# Altium PCB PCB1.PcbDoc
Units mm, origin at the board's own origin, x right, y up, seen from the top; angles counter-clockwise.
Board outline 60.2 x 55.89 mm, 2 copper layers (Top Layer, Bottom Layer); 37 components, 36 nets, 189 pads, 46 vias.
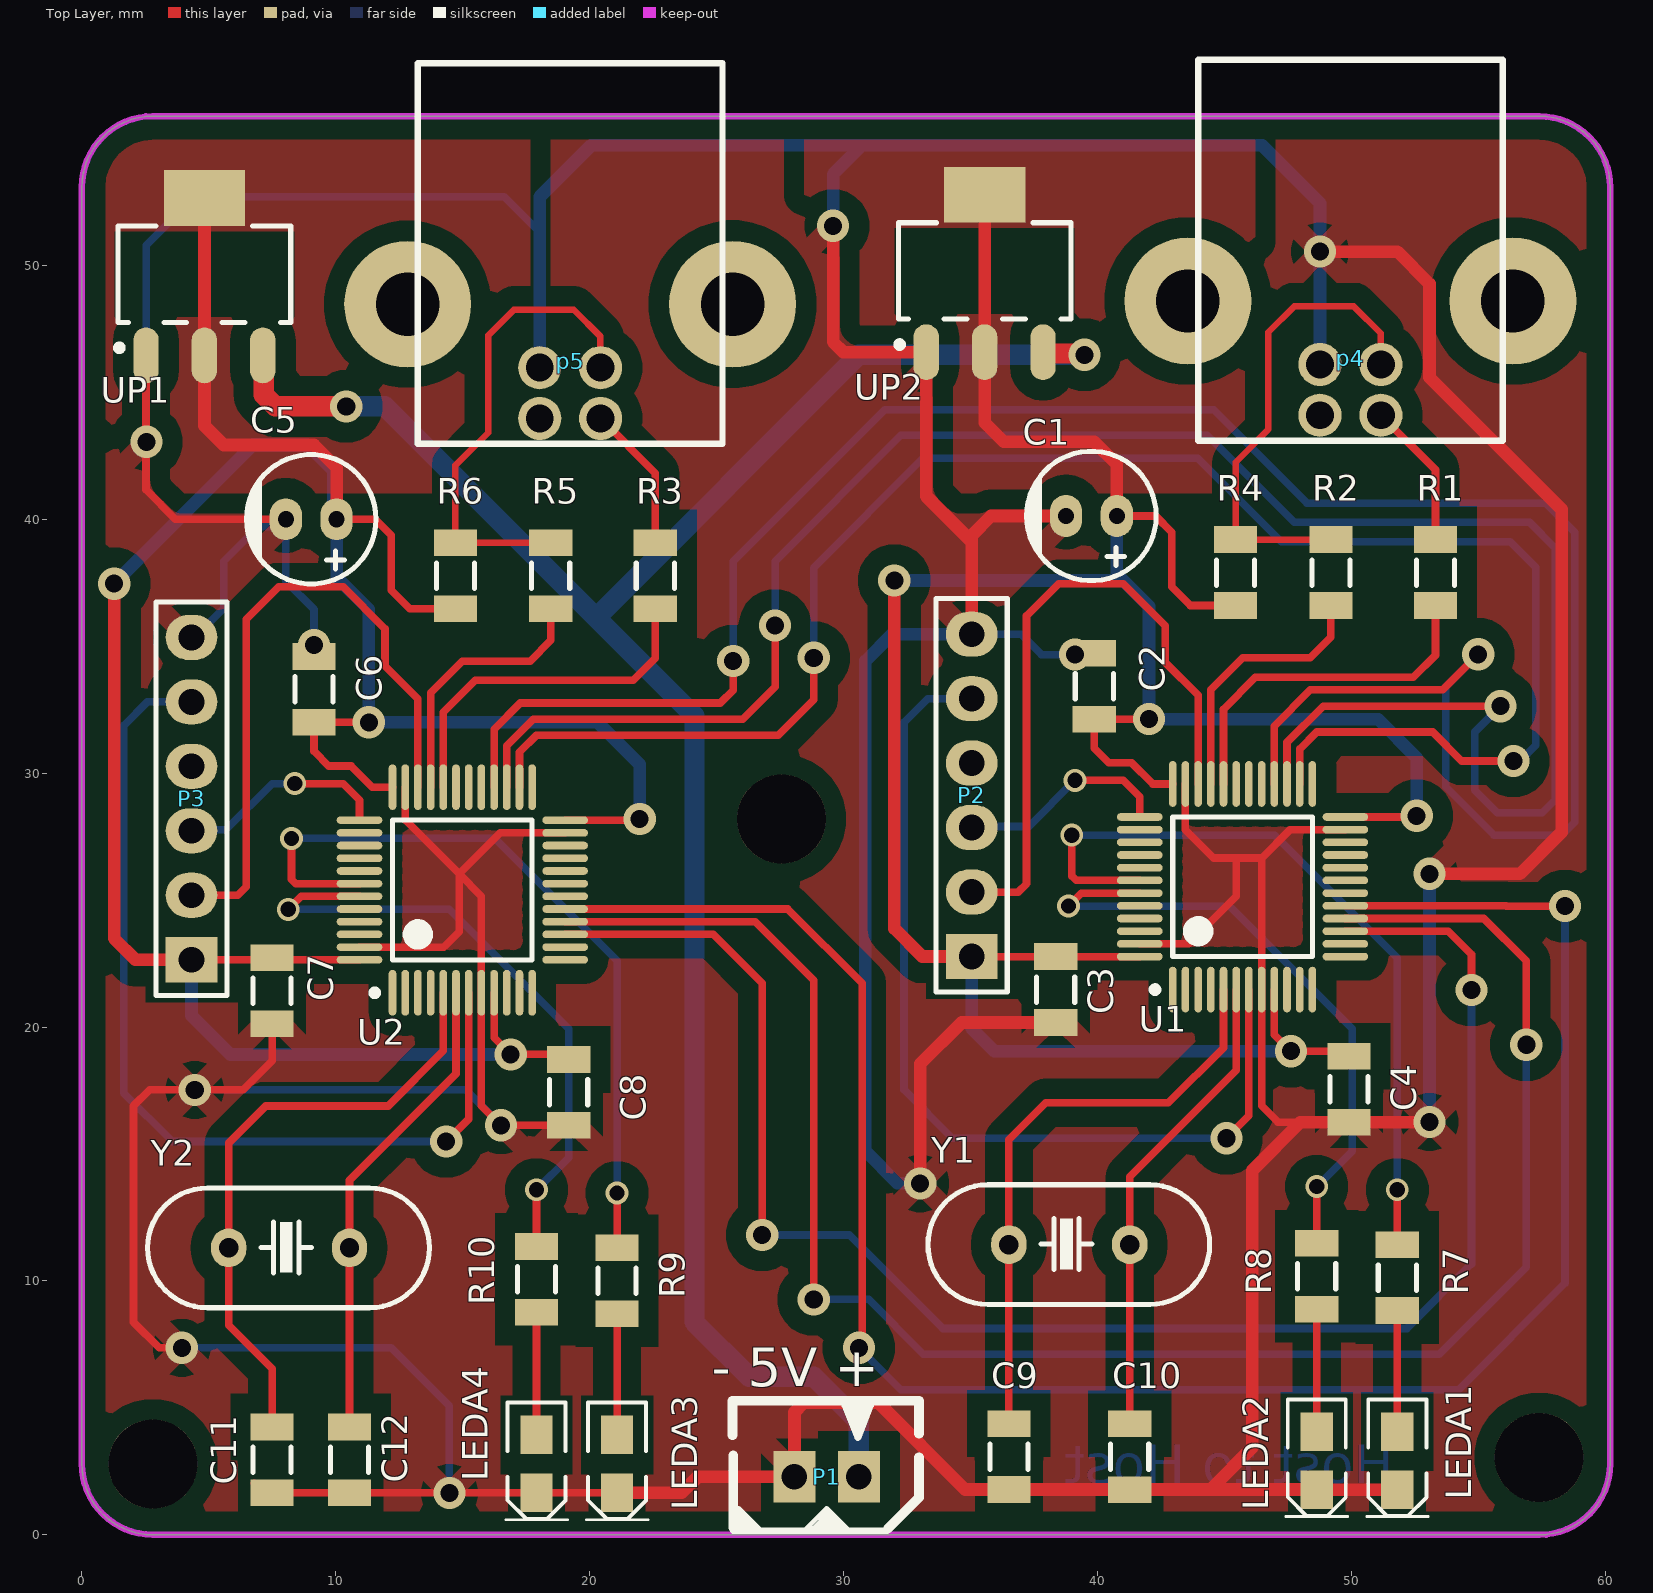
[diagram p0: Top Layer view]
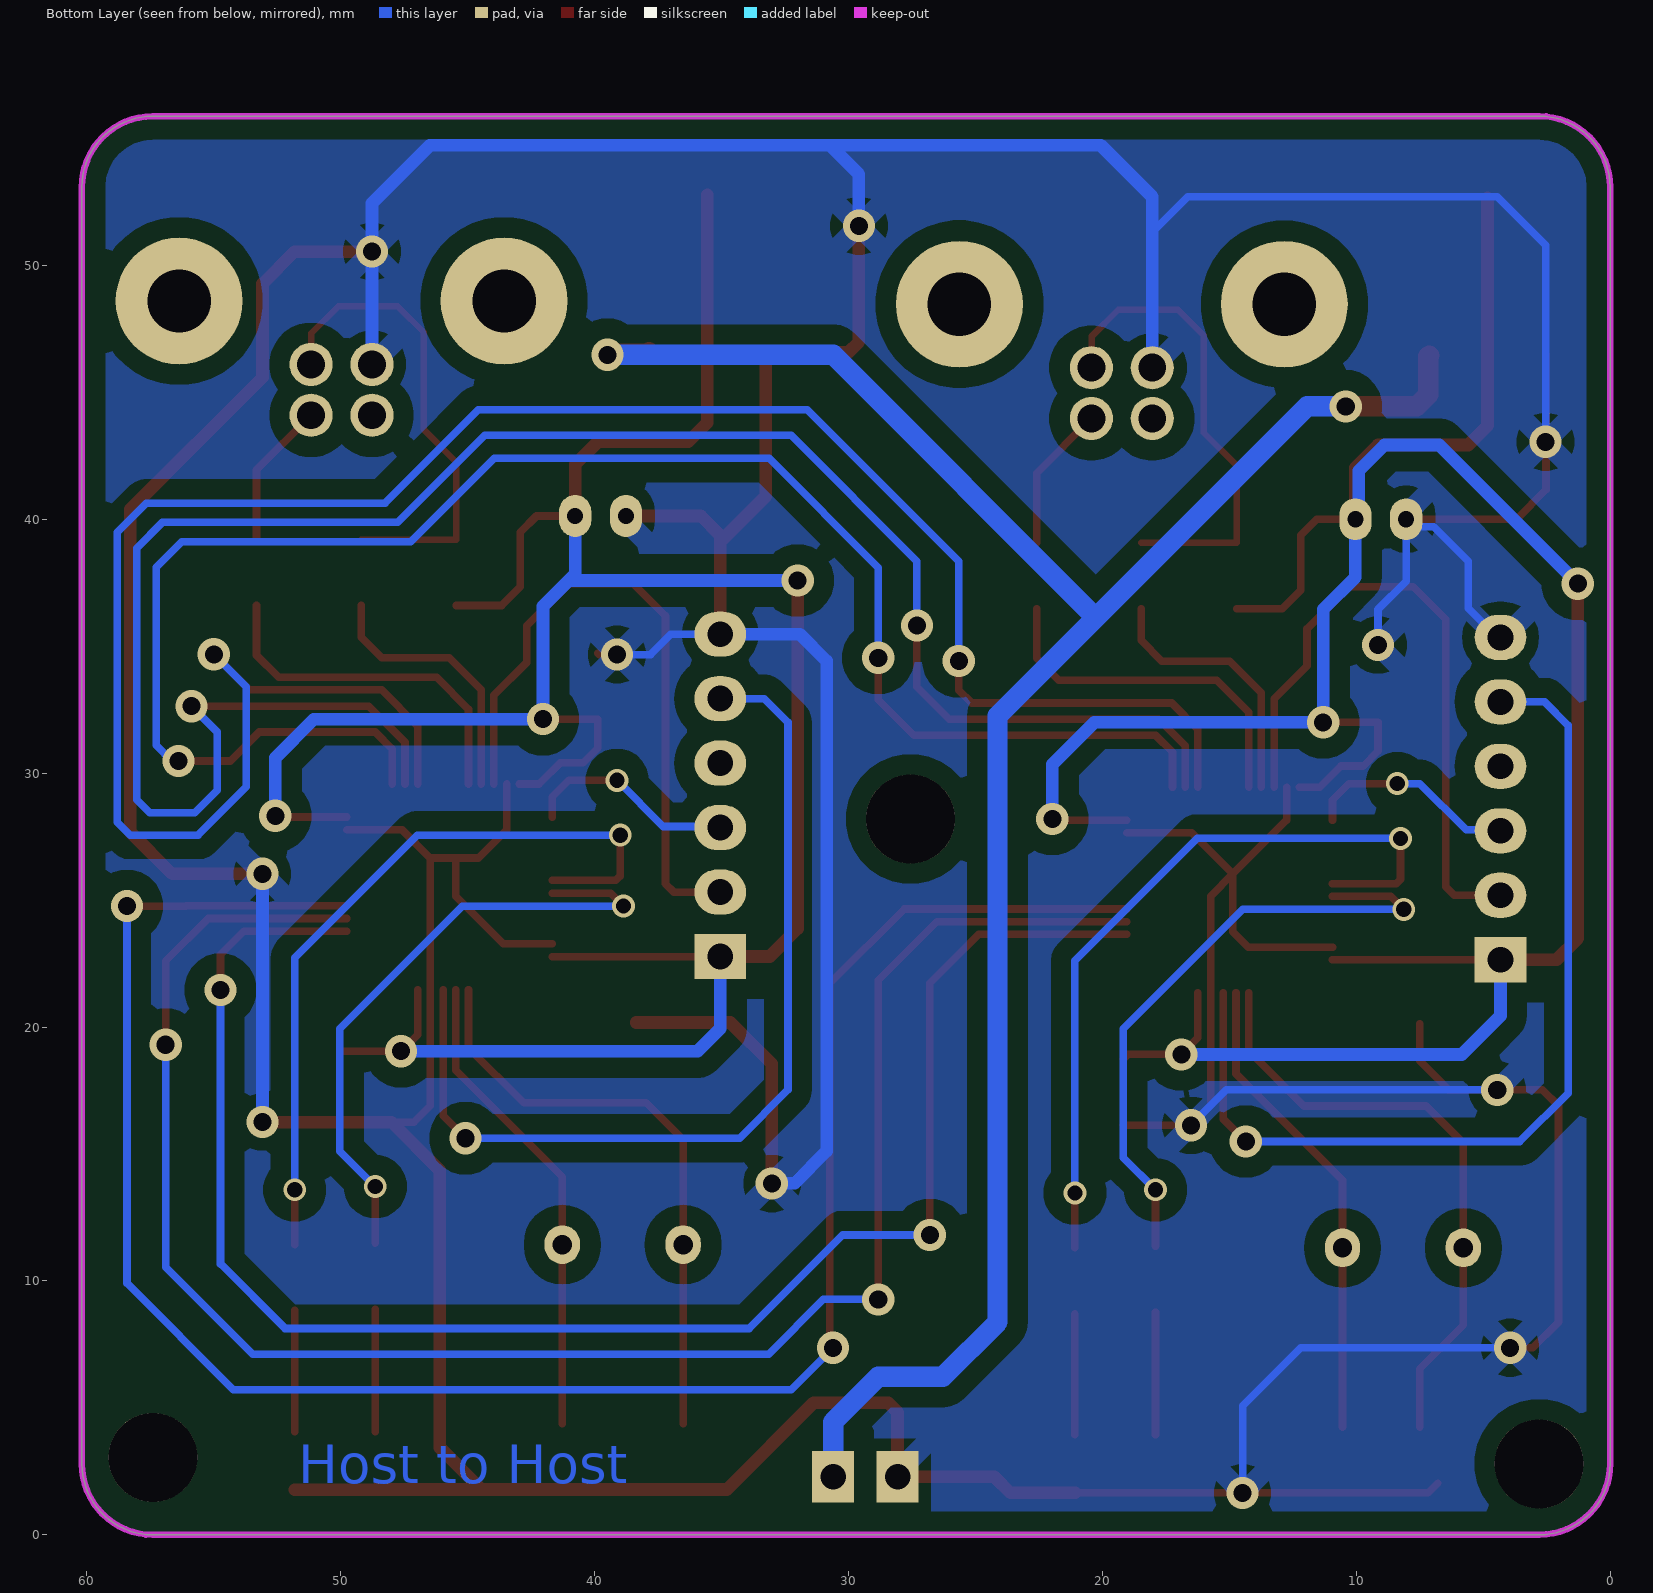
[diagram p1: Bottom Layer view, seen from below]
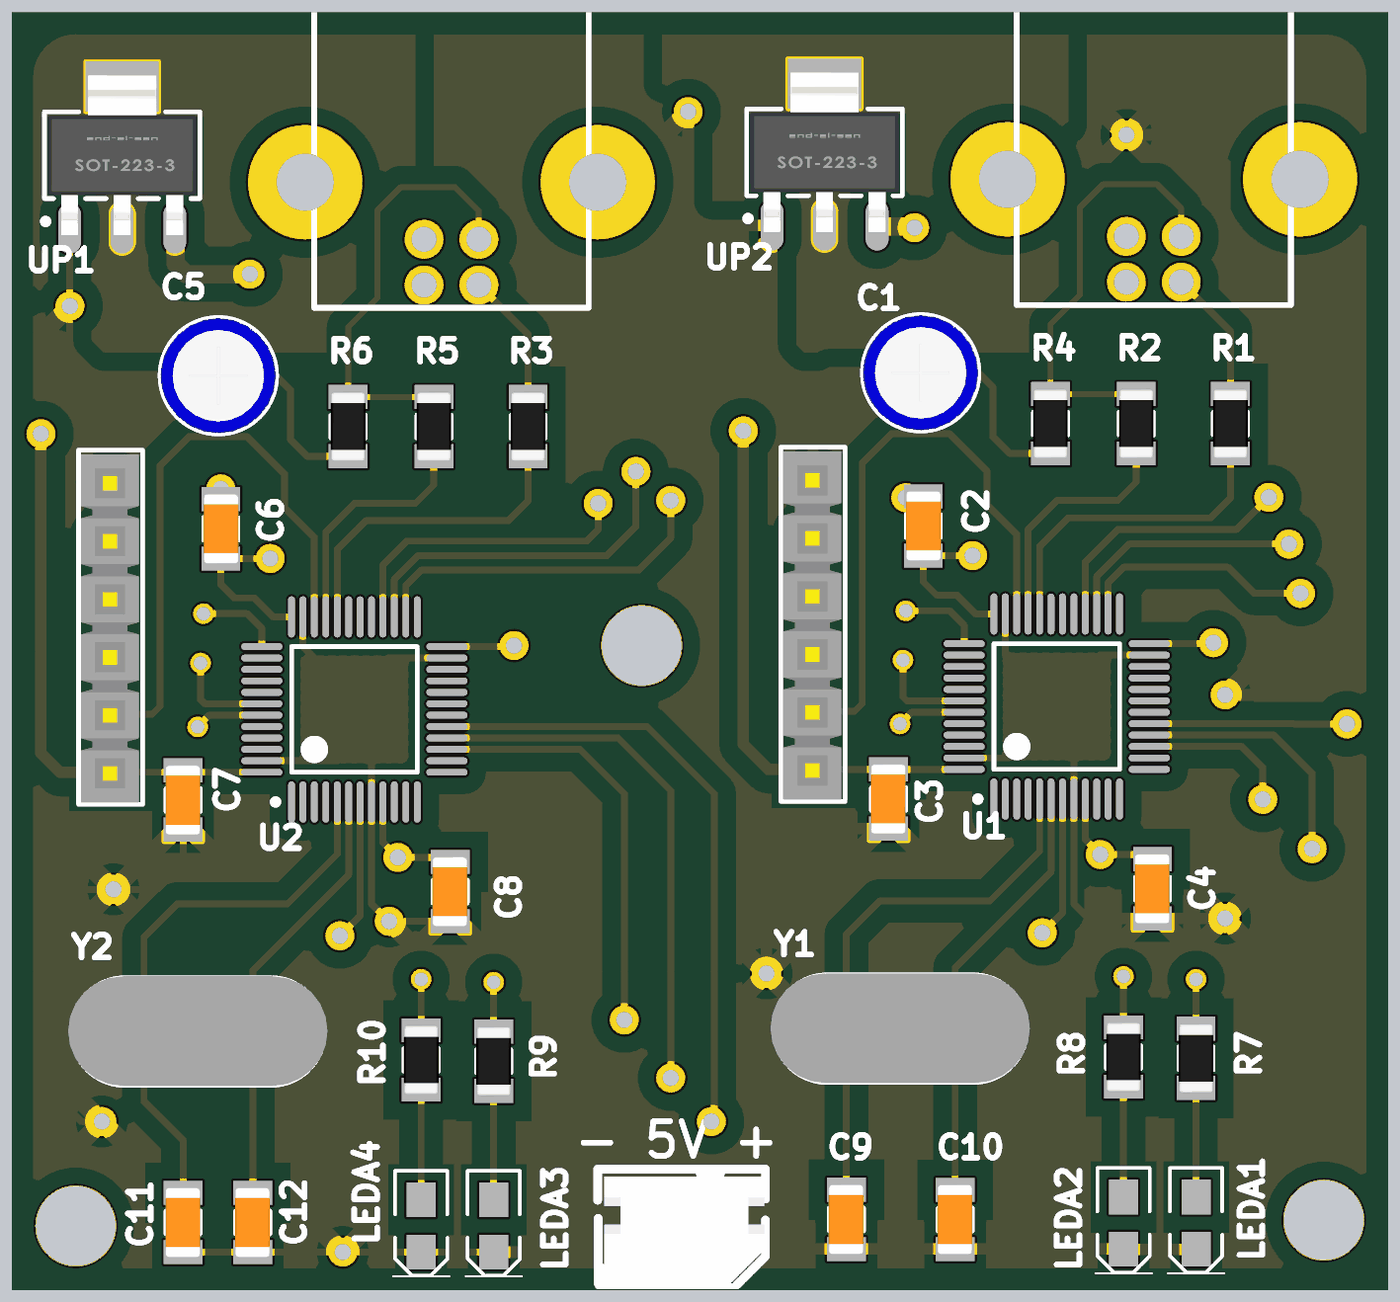
[diagram p2: 3D render of the assembled board from above, using the file's embedded part models]

## Layer stack, top to bottom
Top Solder: solder mask 0.0102, Solder Resist, Dk 3.5
Top Layer: signal copper 0.0356
Dielectric 1: dielectric 0.32, FR-4, Dk 4.8
Bottom Layer: signal copper 0.0356
Bottom Solder: solder mask 0.0102, Solder Resist, Dk 3.5

## Board outline
2.794,0 cw(c2.794,2.797) -0.003,2.797 0,2.794 0,53.086 cw(c2.797,53.086) 2.797,55.883 2.794,55.88 57.404,55.88 cw(c57.404,53.083) 60.201,53.083 60.198,53.086 60.198,2.794 cw(c57.401,2.794) 57.401,-0.003 57.404,0

## Design rules (kind name [scope] priority, off if disabled: settings)
Clearance [All] p1: gap=0.8 ignorepadtopadclearanceinfootprint=FALSE
PolygonConnect [All] p1: connectstyle=Direct reliefconductorwidth=0.8 reliefentries=4 polygonreliefangle="45 Angle" airgapwidth=0.5
RoutingVias [All] p1: holewidth=0.711 width=1.27 viastyle="Through Hole" minholewidth=0.711 minwidth=1.27 maxholewidth=0.711 maxwidth=1.27
SolderMaskExpansion [All] p1: expansion=0.102 istentingtop=FALSE
Width [All] p1: maxlimit=1 minlimit=0.254 preferedwidth=0.5
30 further rules are at their usual default settings.

## Components (designator, comment, footprint, x,y, rotation, side; value= is the part's Value field where it differs from the comment)
C1 "10uF" "cap 01" 39.767,40.132 r0 top
C2 "100nF" SMD_CAP_1206 39.878,32.131 r90 top
C3 "100nF" SMD_CAP_1206 38.361,22.777 r270 top
C4 "100nF" SMD_CAP_1206 49.911,18.852 r270 top
C5 "10uF" "cap 01" 9.033,40.005 r0 top
C6 "100nF" SMD_CAP_1206 9.144,32.004 r90 top
C7 "100nF" SMD_CAP_1206 7.493,22.733 r270 top
C8 "100nF" SMD_CAP_1206 19.177,18.725 r270 top
C9 "10pF" SMD_CAP_1206 36.515,4.379 r270 top
C10 "10pF" SMD_CAP_1206 41.275,4.374 r270 top
C11 "10pF" SMD_CAP_1206 7.493,4.247 r270 top
C12 "10pF" SMD_CAP_1206 10.541,4.247 r270 top
LEDA1 "LED0" SMD_08_05_LED 51.816,2.921 r270 top
LEDA2 "LED0" SMD_08_05_LED 48.641,2.921 r270 top
LEDA3 "LED0" SMD_08_05_LED 21.082,2.794 r270 top
LEDA4 "LED0" SMD_08_05_LED 17.907,2.794 r270 top
P1 "- 5V +" TMS2-M/R 28.988,3.492 r90 top
P2 "Header 6" "HEADER 6X1" 35.052,22.777 r90 top
P3 "Header 6" "HEADER 6X1" 4.318,22.65 r90 top
p4 "usb4" ConUSB_B_F 49.968,46.351 r90 top
p5 "usb4" ConUSB_B_F 19.234,46.224 r90 top
R1 "22R" SMD_RES_1206 53.32,39.203 r270 top value=1K
R2 "22R" SMD_RES_1206 49.2,39.203 r270 top value=1K
R3 "22R" SMD_RES_1206 22.586,39.076 r270 top value=1K
R4 "1.5K" SMD_RES_1206 45.446,39.203 r270 top value=1K
R5 "22R" SMD_RES_1206 18.466,39.076 r270 top value=1K
R6 "1.5K" SMD_RES_1206 14.712,39.076 r270 top value=1K
R7 "680" SMD_RES_1206 51.816,8.834 r90 top
R8 "680" SMD_RES_1206 48.641,8.89 r90 top
R9 "680" SMD_RES_1206 21.082,8.707 r90 top
R10 "680" SMD_RES_1206 17.907,8.763 r90 top
U1 "STM32F103C8T6" LQFP48_N 45.72,25.527 r90 top
U2 "STM32F103C8T6" LQFP48_N 14.986,25.4 r90 top
UP1 "3V3" SOT223 4.826,49.657 r90 top
UP2 "3V3" SOT223 35.56,49.784 r90 top
Y1 "12 MHz" XTAL 36.515,11.43 r0 top
Y2 "12 MHz" XTAL 5.781,11.303 r0 top

## Footprints (in the part's own frame and the unit in brackets; to place one, negate y for a bottom-side part, rotate by r counter-clockwise, add the part's x,y. Pads: shape width x height; smd on the part's side, far side on the other; paste and mask are expansions set on the pad)
"cap 01" [mm]
  oval 1.27x1.651 hole 0.635: 1(1,0) 2(-1,0)
  silkscreen extent -2.55,-2.55 2.55,2.55, body extent -2.53,-2.53 2.53,2.53, height 12.54
ConUSB_B_F [mm]
  round 1.7 hole 1.1: 1(-2.25,1.2) 2(-2.25,-1.2) 3(-0.25,-1.2) 4(-0.25,1.2)
  round 5 hole 2.5: 5(2.25,6.4) 6(2.25,-6.4)
  silkscreen extent -3.25,-6 11.75,6
"HEADER 6X1" [mil]
  rect 70x80 hole 40: 1(0,0)
  oval 70x80 hole 40: 2(100,0) 3(200,0) 4(300,0) 5(400,0) 6(500,0)
  silkscreen extent -55,-55 555,55, body extent -52,-49 548,51, height 330
LQFP48_N [mm] "Thin QFP, 48-Leads, Body 7x7mm, Pitch 0.5mm, IPC Medium Density"
  oval 1.8x0.3 smd: 1(-4.05,2.75) 2(-4.05,2.25) 3(-4.05,1.75) 4(-4.05,1.25) 5(-4.05,0.75) 6(-4.05,0.25) 7(-4.05,-0.25) 8(-4.05,-0.75) 9(-4.05,-1.25) 10(-4.05,-1.75) 11(-4.05,-2.25) 12(-4.05,-2.75) 25(4.05,-2.75) 26(4.05,-2.25) 27(4.05,-1.75) 28(4.05,-1.25) 29(4.05,-0.75) 30(4.05,-0.25) 31(4.05,0.25) 32(4.05,0.75) 33(4.05,1.25) 34(4.05,1.75) 35(4.05,2.25) 36(4.05,2.75)
  oval 0.3x1.8 smd: 13(-2.75,-4.05) 14(-2.25,-4.05) 15(-1.75,-4.05) 16(-1.25,-4.05) 17(-0.75,-4.05) 18(-0.25,-4.05) 19(0.25,-4.05) 20(0.75,-4.05) 21(1.25,-4.05) 22(1.75,-4.05) 23(2.25,-4.05) 24(2.75,-4.05) 37(2.75,4.05) 38(2.25,4.05) 39(1.75,4.05) 40(1.25,4.05) 41(0.75,4.05) 42(0.25,4.05) 43(-0.25,4.05) 44(-0.75,4.05) 45(-1.25,4.05) 46(-1.75,4.05) 47(-2.25,4.05) 48(-2.75,4.05)
  silkscreen extent -4.17,-2.75 2.75,3.57, body extent -3.5,-3.5 3.5,3.5, height 1.6
SMD_08_05_LED [mil]
  rect 60x50 smd: 1(-45,0) 2(45,0)
  silkscreen extent -95,-48 87,48
SMD_CAP_1206 [mm]
  rect 1.05x1.7 smd: 1(0,0) 2(2.596,0)
  silkscreen extent 0.8,-0.75 1.8,0.75, body extent -0.22,-0.77 2.82,0.75, height 0.75
SMD_RES_1206 [mm] "Chip Resistor, 2-Leads, Body 3.2x1.6mm, IPC High Density _ (0.125 W)"
  rect 1.05x1.7 smd: 1(0,0) 2(2.596,0)
  silkscreen extent 0.8,-0.75 1.8,0.75, body extent -0.23,-0.76 2.82,0.76, height 0.6
SOT223 [mm] "SOT223, 4-Leads, Body 6.5x3.5mm, Pitch 2.30mm-Designer Abbas Basereh"
  oval 2.2x1 smd: 1(-3.2,2.3) 2(-3.2,0) 3(-3.2,-2.3)
  rect 2.2x3.2 smd: 4(3,0)
  Top Layer pour cut-out: -1.7,3.556 1.7,3.556 1.7,-3.556 -1.7,-3.556
  silkscreen extent -3.02,-3.4 1.9,3.47, body extent -3.5,-3.25 3.5,3.25, height 1.7
TMS2-M/R [mil]
  rect 80x65 hole 39.37: 1(-47.47,-63.75) 2(-47.47,36.25)
  silkscreen extent -131,-157 70,132, body extent -135,-155 58,121, height 248
XTAL [mil]
  oval 55x60 hole 30: 1(0,0) 2(187.4,0)
  silkscreen extent -126,-93 311,93, body extent -131,-94 316,95, height 514

## Part data
C1 C5: library part Cap-Polar, "Polar Capacitor", Voltage=6.3V, Adding Date=1387/12/20, Designer="Saeid Jorablo", Organazation=ControTec
C2 C3 C4 C6 C7 C8 C9 C10 C11 C12: library part Cap-Bipolar, "Bipolar Capacitor", Voltage=100V, Adding Date=1387/12/20, Designer="Saeid Jorablo", Organazation=ControTec
LEDA1 LEDA2 LEDA3 LEDA4: "Typical INFRARED GaAs LED", LatestRevisionDate=08-Jul-2005, LatestRevisionNote="Mech Layer 1 removed.", PackageReference=LED-0, Published=8-Jun-2000, Publisher="Altium Limited"
P1: library part "Header 2", "Header, 2-Pin", LatestRevisionDate=17-Jul-2002, LatestRevisionNote="Re-released for DXP Platform.", Publisher="Altium Limited"
P2 P3: "Header, 6-Pin", LatestRevisionDate=17-Jul-2002, LatestRevisionNote="Re-released for DXP Platform.", Publisher="Altium Limited"
p4 p5: library part USB, "USB Connector-B Type", Adding Date=10/26/2010, Company="DASE Co", Designer="Eng. Saeid Jorablo"
R1 R2 R3 R4 R5 R6: library part Resistor, "Resistor", Power="1/8 W", Tolerance=5%
R7 R8 R9 R10: library part Res1, "Resistor", LatestRevisionDate=17-Jul-2002, LatestRevisionNote="Re-released for DXP Platform.", PackageDescription="Axial Device, Thru-Hole; 2 Leads; 0.3 in Pin Spacing", PackageReference=AXIAL-0.3, Published=8-Jun-2000, Publisher="Altium Limited"
U1 U2: "STM32 ARM-based 32-bit MCU with 64 Kbytes Flash, 48-pin LQFP, Industrial Temperature", ComponentLink1Description="Manufacturer Link", ComponentLink1URL=www.st.com/stm32, ComponentLink2Description=Datasheet, ComponentLink2URL=http://www.st.com/stonline/products/literature/ds/13587.pdf, DatasheetVersion="rev6, Mar-2008", PackageDescription="48-Pin Low-Profile Quad Flat Pack, 7 x 7 mm Body, 0.5 mm Pitch (LQFP48)", PackageReference=LQFP48, PackageVersion=Mar-2008, Published=30-May-2008, Publisher="Altium Limited"
UP1 UP2: library part AMS1117-x.x, "x.x Volt, 800mA Low-Dropout Linear Regulator, 4-pin SOT-223", Data=16-12-2016, Designer="Ali Hafizi"
Y1 Y2: library part XTAL, "XTAL Crystal", Company=E.P.I.L, Design Date=11/04/2011

## Free pads (board coordinates)
  round 3.5 hole 3.5: 2(2.794,2.794) 2(27.559,28.194) 2(57.404,3.048)

## Via types
v1: diameter 1.27, hole 0.711, Top Layer to Bottom Layer, 36 vias
v2: diameter 0.9, hole 0.6, Top Layer to Bottom Layer, 10 vias

## Nets (pads, with @x,y where several pads share a name; then routed paths per layer and width w, separated by ;. In a path a pad name is that pad's centre, name@x,y a point inside that pad or via, vN(x,y) a via of type N, cw(c..) or ccw(c..) an arc to the next point about the centre after c; other vN are vias at no path point)
GND: C1.2 C2.2 C3.2 C4.2 C5.2 C6.2 C7.2 C8.2 C9.2 C10.2 C11.2 C12.2 LEDA1.2 LEDA2.2 LEDA3.2 LEDA4.2 P1.2 P2.6 P3.6 p4.4 p5.4 U1.8 U1.23 U1.35 U1.47 U2.8 U2.23 U2.35 U2.47 UP1.1 UP2.1 | length 380.8
  Top Layer w0.3: UP1.1 2.526,41.162 3.683,40.005 C5.2 ; v1(3.937,7.366) 3.048,7.366 2.032,8.382 2.032,16.891 2.667,17.526 v1(4.445,17.526) 6.35,17.526 7.493,18.669 C7.2 ; C11.2@6.793,2.026 7.168,1.651 C11.2 v1(14.478,1.651) LEDA4.2 LEDA3.2 ; U2.47 14.26,23.15 14.859,23.749 14.859,26.035 ; U2.35 12.736,28.158 14.859,26.035 ; U2.23 16.474,27.65 14.859,26.035 ; C8.2 v1(16.51,16.129) 15.736,16.903 U2.8 15.736,25.158 14.859,26.035 ; v1(39.116,34.671) 39.822,34.671 C2.2 ; U1.47 43.597,23.277 45.466,25.146 45.466,26.595 45.529,26.658 ; U1.35 43.47,27.777 44.589,26.658 45.529,26.658 ; 48.006,16.256 47.117,16.256 46.47,16.903 U1.8 46.47,26.658 ; U1.23 47.589,27.777 46.47,26.658 ; 45.529,26.658 46.47,26.658
  Top Layer w0.5: LEDA3.2 23.622,1.651 24.257,2.286 P1.2 28.067,4.826 28.448,5.207 31.369,5.207 34.793,1.783 C9.2 44.45,1.783 ; v1(29.591,51.562) 29.591,46.99 29.997,46.584 UP2.1 33.26,40.908 35.052,39.116 ; v1(33.02,13.843) 33.02,18.542 34.659,20.181 C3.2 ; P2.6 35.052,39.116 ; C1.2 35.814,40.132 35.052,39.37 35.052,39.116 ; v1(48.768,50.546) 51.816,50.546 53.086,49.276 53.086,45.593 58.293,40.386 58.293,27.686 56.642,26.035 v1(53.086,26.035) ; LEDA1.2 LEDA2.2 48.636,1.783 44.45,1.783 ; v1(53.086,16.256) C4.2 48.006,16.256 46.101,14.351 46.101,3.434 44.45,1.783
  Bottom Layer w0.3: v1(2.54,43.053) 2.54,50.8 4.445,52.705 16.637,52.705 18.034,51.308 ; v1(3.937,7.366) 12.192,7.366 14.478,5.08 v1(14.478,1.651) ; P3.6 4.445,35.35 5.588,36.493 5.588,38.354 6.948,39.714 7.742,39.714 C5.2 8.033,37.56 9.144,36.449 v1(9.144,35.052) ; v1(4.445,17.526) 15.113,17.526 v1(16.51,16.129) ; P2.6 36.996,35.477 37.802,34.671 v1(39.116,34.671)
  Bottom Layer w0.5: p5.4 18.034,51.308 18.034,52.705 20.066,54.737 30.734,54.737 ; v1(29.591,51.562) 29.591,53.594 30.734,54.737 ; v1(33.02,13.843) 32.131,13.843 30.861,15.113 30.861,34.417 31.921,35.477 P2.6 ; p4.4 v1(48.768,50.546) 48.768,52.451 46.482,54.737 30.734,54.737 ; v1(53.086,16.256) v1(53.086,26.035)
JTCK1: P3.3 U2.37 | length 8.4
  Top Layer w0.3: v2(8.382,29.591) 10.287,29.591 10.936,28.942 U2.37
  Bottom Layer w0.3: P3.3 4.359,27.771 5.673,27.771 7.493,29.591 v2(8.382,29.591)
JTCK2: P2.3 U1.37 | length 8.4
  Top Layer w0.3: v2(39.116,29.718) 41.021,29.718 41.67,29.069 U1.37
  Bottom Layer w0.3: P2.3 35.093,27.898 37.296,27.898 v2(39.116,29.718)
JTMS1: P3.2 U2.34 | length 26.3
  Top Layer w0.3: P3.2 6.14,25.19 6.477,25.527 6.477,36.068 7.747,37.338 10.287,37.338 11.938,35.687 11.938,34.234 13.236,32.936 U2.34
JTMS2: P2.2 U1.34 | length 26.3
  Top Layer w0.3: P2.2 36.874,25.317 37.211,25.654 37.211,36.195 38.481,37.465 41.021,37.465 42.672,35.814 42.672,34.361 43.97,33.063 U1.34
MISO1: U1.17 U2.17 | length 81.1
  Top Layer w0.3: U2.17 27.801,24.65 30.734,21.717 30.734,7.493 v1(30.607,7.366) ; U1.17 56.1,24.777 56.112,24.765 v1(58.42,24.765)
  Bottom Layer w0.3: v1(30.607,7.366) 32.258,5.715 54.229,5.715 58.42,9.906 v1(58.42,24.765)
MISO2: U1.28 U2.28 | length 89.8
  Top Layer w0.3: U2.28 16.236,31.73 17.272,32.766 25.146,32.766 25.654,33.274 v1(25.654,34.417) ; U1.28 46.97,31.857 48.395,33.282 53.602,33.282 v1(55.002,34.682)
  Bottom Layer w0.3: v1(25.654,34.417) 25.654,38.354 31.623,44.323 44.577,44.323 48.26,40.64 57.658,40.64 58.801,39.497 58.801,28.067 58.293,27.559 55.626,27.559 53.721,29.464 53.721,33.401 v1(55.002,34.682)
MOSI1: U1.16 U2.16 | length 73.6
  Top Layer w0.3: U2.16 26.523,24.15 28.829,21.844 v1(28.829,9.271) ; U1.16 55.225,24.277 56.896,22.606 v1(56.896,19.304)
  Bottom Layer w0.3: v1(28.829,9.271) 30.988,9.271 33.147,7.112 53.467,7.112 56.896,10.541 v1(56.896,19.304)
MOSI2: U1.27 U2.27 | length 80.8
  Top Layer w0.3: U2.27 16.736,31.087 17.78,32.131 26.035,32.131 27.305,33.401 v1(27.305,35.814) ; U1.27 47.47,31.214 48.895,32.639 v1(55.88,32.639)
  Bottom Layer w0.3: v1(27.305,35.814) 27.305,38.354 32.258,43.307 44.323,43.307 47.752,39.878 57.023,39.878 58.039,38.862 58.039,28.956 57.531,28.448 55.753,28.448 54.864,29.337 54.864,31.623 v1(55.88,32.639)
NetC9_1: C9.1 U1.5 Y1.1 | length 23.4
  Top Layer w0.3: C9.1 Y1.1 36.515,15.56 37.973,17.018 42.799,17.018 44.97,19.189 U1.5
NetC10_1: C10.1 U1.6 Y1.2 | length 18.8
  Top Layer w0.3: C10.1 Y1.2 41.275,14.097 45.47,18.292 U1.6
NetC11_1: C11.1 U2.5 Y2.1 | length 24.1
  Top Layer w0.3: C11.1 7.493,6.543 5.781,8.255 Y2.1 5.781,15.433 7.239,16.891 12.065,16.891 14.236,19.062 U2.5
NetC12_1: C12.1 U2.6 Y2.2 | length 18.8
  Top Layer w0.3: C12.1 Y2.2 10.541,13.97 14.736,18.165 U2.6
NetLEDA1_1: LEDA1.1 R7.1 | length 4.8
  Top Layer w0.3: LEDA1.1 R7.1
NetLEDA2_1: LEDA2.1 R8.1 | length 4.8
  Top Layer w0.3: LEDA2.1 R8.1
NetLEDA3_1: LEDA3.1 R9.1 | length 4.8
  Top Layer w0.3: LEDA3.1 R9.1
NetLEDA4_1: LEDA4.1 R10.1 | length 4.8
  Top Layer w0.3: LEDA4.1 R10.1
NetP1_1: P1.1 UP1.3 UP2.3 | length 83.1
  Top Layer w0.8: UP1.3 7.164,46.419 7.164,44.906 7.62,44.45 v1(10.414,44.45) ; UP2.3 37.911,46.533 39.446,46.533 v1(39.497,46.482)
  Bottom Layer w0.8: v1(10.414,44.45) 11.938,44.45 20.256,36.131 ; P1.1 30.607,4.445 28.829,6.223 26.289,6.223 24.13,8.382 24.13,32.258 20.256,36.131 ; v1(39.497,46.482) 30.607,46.482 20.256,36.131
Netp4_2: p4.2 R1.1 | length 5.8
  Top Layer w0.3: p4.2 53.32,41.949 R1.1
Netp4_3: p4.3 R2.1 R4.1 | length 19
  Top Layer w0.254: R2.1 R4.1 45.446,42.251 46.736,43.541 46.736,47.371 47.752,48.387 50.105,48.387 51.16,47.332 51.16,46.109 p4.3
Netp5_2: p5.2 R3.1 | length 5.8
  Top Layer w0.3: p5.2 22.586,41.822 R3.1
Netp5_3: p5.3 R5.1 R6.1 | length 19
  Top Layer w0.254: R5.1 R6.1 14.712,42.124 16.002,43.414 16.002,47.244 17.018,48.26 19.371,48.26 20.426,47.205 20.426,45.982 p5.3
NetR7_2: R7.2 U1.42 | length 30.5
  Top Layer w0.3: v2(38.989,27.559) 38.989,25.953 39.165,25.777 U1.42 ; R7.2 v2(51.816,13.589)
  Bottom Layer w0.3: v2(38.989,27.559) 46.99,27.559 51.816,22.733 v2(51.816,13.589)
NetR8_2: R8.2 U1.43 | length 25.2
  Top Layer w0.3: v2(38.862,24.765) 39.374,25.277 U1.43 ; R8.2 v2(48.641,13.716)
  Bottom Layer w0.3: v2(38.862,24.765) 45.212,24.765 50.038,19.939 50.038,15.113 v2(48.641,13.716)
NetR9_2: R9.2 U2.42 | length 30.5
  Top Layer w0.3: v2(8.255,27.432) 8.255,25.826 8.431,25.65 U2.42 ; R9.2 v2(21.082,13.462)
  Bottom Layer w0.3: v2(8.255,27.432) 16.256,27.432 21.082,22.606 v2(21.082,13.462)
NetR10_2: R10.2 U2.43 | length 25.1
  Top Layer w0.3: v2(8.128,24.638) 8.64,25.15 U2.43 ; R10.2 v2(17.907,13.589)
  Bottom Layer w0.3: v2(8.128,24.638) 14.478,24.638 19.177,19.939 19.177,14.859 v2(17.907,13.589)
NRST1: P3.5 U2.7 | length 37.2
  Top Layer w0.3: v1(14.351,15.494) 15.236,16.379 U2.7
  Bottom Layer w0.3: P3.5 2.584,32.81 1.651,31.877 1.651,17.399 3.556,15.494 v1(14.351,15.494)
NRST2: P2.5 U1.7 | length 37.2
  Top Layer w0.3: v1(45.085,15.621) 45.97,16.506 U1.7
  Bottom Layer w0.3: P2.5 33.318,32.937 32.385,32.004 32.385,17.526 34.29,15.621 v1(45.085,15.621)
SCK1: U1.15 U2.15 | length 66.5
  Top Layer w0.3: U2.15 24.864,23.65 26.797,21.717 v1(26.797,11.811) ; U1.15 53.82,23.777 54.737,22.86 v1(54.737,21.463)
  Bottom Layer w0.3: v1(26.797,11.811) 30.226,11.811 33.909,8.128 52.197,8.128 54.737,10.668 v1(54.737,21.463)
SCK2: U1.26 U2.26 | length 69.7
  Top Layer w0.3: U2.26 17.236,30.825 17.907,31.496 27.432,31.496 28.829,32.893 v1(28.829,34.544) ; U1.26 47.97,30.952 48.641,31.623 53.213,31.623 54.356,30.48 v1(56.388,30.48)
  Bottom Layer w0.3: v1(28.829,34.544) 28.829,38.1 33.13,42.401 43.959,42.401 47.244,39.116 56.261,39.116 57.27,38.107 57.27,31.099 56.65,30.48 v1(56.388,30.48)
USB1_N: R3.2 U2.32 | length 14.1
  Top Layer w0.3: U2.32 14.236,32.397 15.494,33.655 21.717,33.655 22.586,34.524 R3.2
USB1_P: R5.2 U2.33 | length 10.6
  Top Layer w0.3: U2.33 13.736,33.167 14.986,34.417 17.653,34.417 18.466,35.23 R5.2
USB2_N: R1.2 U1.32 | length 14.1
  Top Layer w0.3: U1.32 44.97,32.524 46.228,33.782 52.451,33.782 53.32,34.651 R1.2
USB2_P: R2.2 U1.33 | length 10.6
  Top Layer w0.3: U1.33 44.47,33.294 45.72,34.544 48.387,34.544 49.2,35.357 R2.2
VCC: C5.1 C6.1 C7.1 C8.1 P3.1 R6.2 U2.9 U2.24 U2.36 U2.48 UP1.2 UP1.4 | length 114
  Top Layer w0.3: P3.1 7.493,22.65 U2.48 ; C5.1 11.557,40.005 12.192,39.37 12.192,37.211 12.923,36.48 R6.2 ; v1(11.303,32.004) C6.1 9.144,30.861 9.723,30.282 10.612,30.282 11.444,29.45 U2.36 ; U2.9 16.236,19.578 v1(16.891,18.923) 18.979,18.923 C8.1 ; U2.24 21.927,28.15 v1(21.971,28.194)
  Top Layer w0.5: v1(1.27,37.465) 1.27,23.495 2.115,22.65 P3.1 ; UP1.4 UP1.2 4.826,43.688 5.588,42.926 9.144,42.926 10.033,42.037 C5.1
  Bottom Layer w0.5: v1(1.27,37.465) 6.731,42.926 8.89,42.926 9.906,41.91 9.906,40.132 C5.1 10.033,37.719 11.303,36.449 v1(11.303,32.004) 20.32,32.004 21.971,30.353 v1(21.971,28.194) ; P3.1 4.318,20.447 5.842,18.923 v1(16.891,18.923)
VCC1: C1.1 C2.1 C3.1 C4.1 P2.1 R4.2 U1.9 U1.24 U1.36 U1.48 UP2.2 UP2.4 | length 109.7
  Top Layer w0.3: P2.1 C3.1 U1.48 ; C1.1 42.291,40.132 42.926,39.497 42.926,37.338 43.657,36.607 R4.2 ; v1(42.037,32.131) C2.1 39.878,30.988 40.457,30.409 41.346,30.409 42.178,29.577 U1.36 ; U1.9 46.97,19.705 v1(47.625,19.05) C4.1@49.893,19.05 ; U1.24 52.534,28.277 v1(52.578,28.321)
  Top Layer w0.5: v1(32.004,37.592) 32.004,23.876 33.103,22.777 P2.1 ; UP2.4 UP2.2 35.56,43.815 36.322,43.053 39.878,43.053 40.767,42.164 C1.1
  Bottom Layer w0.5: v1(32.004,37.592) 41.021,37.592 ; P2.1 35.052,19.939 35.941,19.05 v1(47.625,19.05) ; C1.1 40.767,37.846 41.021,37.592 ; v1(52.578,28.321) 52.578,30.607 51.054,32.131 v1(42.037,32.131) 42.037,36.576 41.021,37.592
pads on no net: P2.4 P3.4 p4.1 p4.5 p4.6 p5.1 p5.5 p5.6 U1.1 U1.2 U1.3 U1.4 U1.10 U1.11 U1.12 U1.13 U1.14 U1.18 U1.19 U1.20 U1.21 U1.22 U1.25 U1.29 U1.30 U1.31 U1.38 U1.39 U1.40 U1.41 U1.44 U1.45 U1.46 U2.1 U2.2 U2.3 U2.4 U2.10 U2.11 U2.12 U2.13 U2.14 U2.18 U2.19 U2.20 U2.21 U2.22 U2.25 U2.29 U2.30 U2.31 U2.38 U2.39 U2.40 U2.41 U2.44 U2.45 U2.46

## Polygon pours and split planes (outlines as drawn)
GND on Bottom Layer "GND_L02_P001" (solid, remove dead copper, pour order 1): 0,55.88 60.198,55.88 60.198,0 0,0
VCC on Top Layer "VCC_L01_P003" (solid, remove dead copper, pour order 3): -0.127,55.88 -0.127,41.021 17.653,41.021 17.653,55.88
VCC1 on Top Layer "VCC1_L01_P002" (solid, remove dead copper, pour order 2): 28.448,55.88 28.448,41.021 46.228,41.021 46.228,55.88
GND on Top Layer "GND_L01_P000" (solid, remove dead copper, pour order 0): 0,55.753 0.127,55.88 60.198,55.88 60.198,0 0,0

## Keep-outs
Keep-Out Layer:
  lines w0.254: -0.003,2.797 ccw(c2.794,2.797) 2.794,0 57.404,0 ; 0,2.794 0,53.086 cw(c2.797,53.086) 2.797,55.883 ; 2.794,55.88 57.404,55.88 cw(c57.404,53.083) 60.201,53.083 ; 57.401,-0.003 ccw(c57.401,2.794) 60.198,2.794 60.198,53.086

## Other copper
Bottom Layer:
  text "Host to Host" at 51.677,2.032 h1.52